# Altium PCB 底板.PcbDoc
Units mm, origin at the board's own origin, x right, y up, seen from the top; angles counter-clockwise.
Board outline 422.53 x 103.76 mm, 4 copper layers (Top Layer, GND, VCC, Bottom Layer); 122 components, 122 nets, 427 pads, 149 vias.
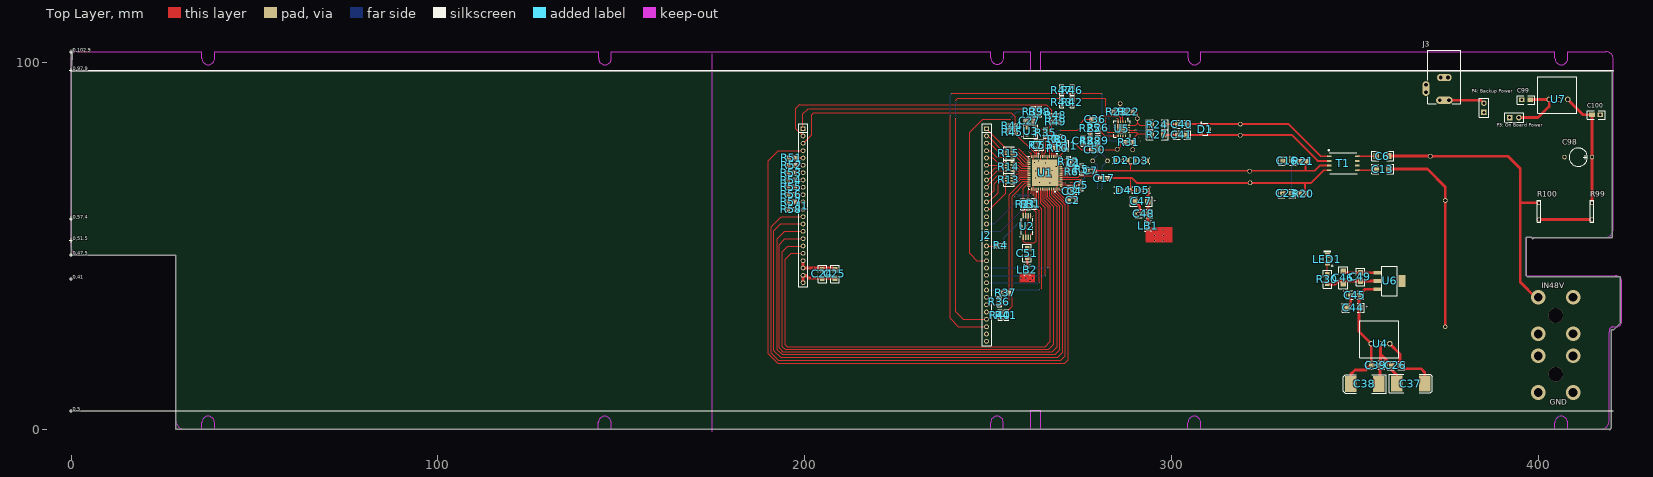
[diagram p0: Top Layer view]
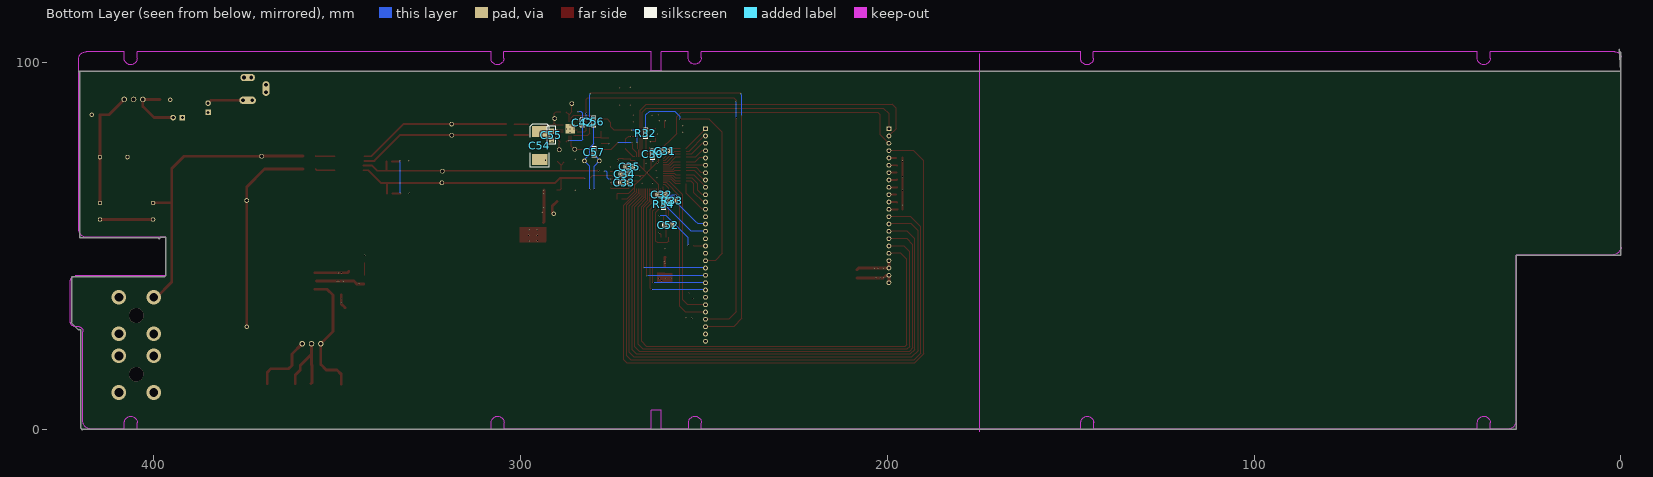
[diagram p1: Bottom Layer view, seen from below]
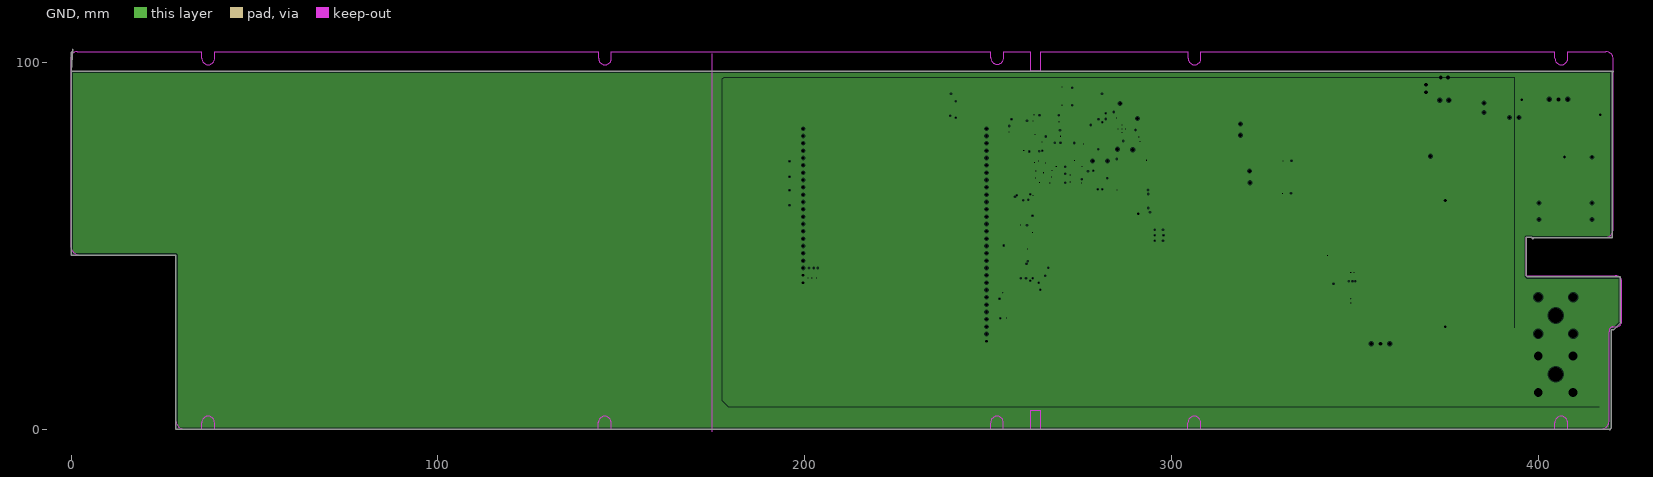
[diagram p2: GND, clearances drawn from the general rule]
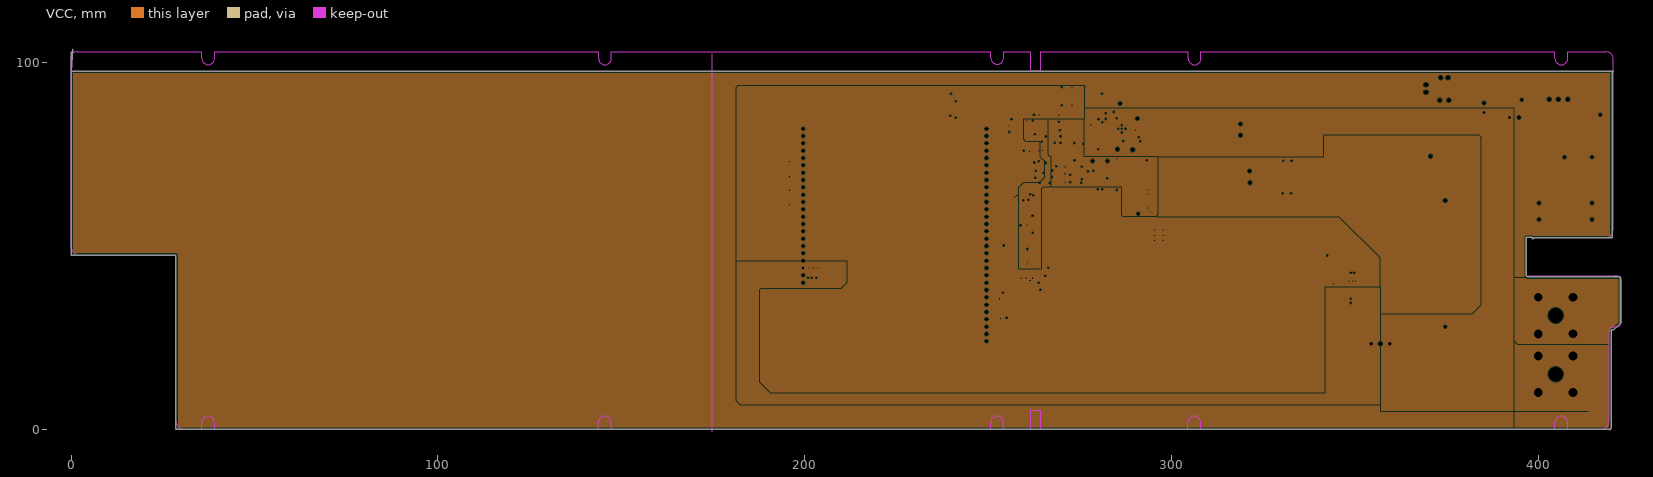
[diagram p3: VCC, clearances drawn from the general rule]

## Layer stack, top to bottom
Top Layer: signal copper 0.0356
Dielectric: core 0.32, FR-4, Dk 4.8
GND: plane copper 0.0356, net GND
Dielectric: prepreg 0.32, FR-4, Dk 4.8
VCC: plane copper 0.0356
Dielectric: core 0.32, FR-4, Dk 4.8
Bottom Layer: signal copper 0.0356

## Board outline
0,97.663 420.313,97.663 420.44,97.536 420.116,97.212 420.116,52.197 398.78,52.197 398.526,51.943 398.169,52.3 396.79,52.3 396.79,41.8 397.061,41.529 422.402,41.529 422.402,29.21 422.529,29.083 420.497,27.051 419.862,27.051 419.862,0.254 419.481,-0.127 419.354,0 28.575,0 28.575,47.371 28.448,47.498 0,47.498 0,102.743 0.381,103.124 0.381,103.632

## Design rules (kind name [scope] priority, off if disabled: settings)
Clearance [All] p1: gap=0.152
HoleSize [All] p1: absolutevalues=TRUE maxlimit=5.08 minlimit=0.025 maxpercent=80.000 minpercent=20.000
MinimumSolderMaskSliver [All] p1 off: minsoldermaskwidth=0.254
PlaneClearance [All] p1: clearance=0.254
PlaneConnect [All] p1: planeconnectstyle=Direct reliefexpansion=0.508 reliefentries=4 reliefconductorwidth=0.254 reliefairgap=0.254
PolygonConnect [All] p1: connectstyle=Direct reliefconductorwidth=0.254 reliefentries=4 polygonreliefangle="90 Angle"
RoutingVias [All] p1: holewidth=0.711 width=1.27 viastyle="Through Hole" minholewidth=0.5 minwidth=1 maxholewidth=3 maxwidth=5
SilkToSilkClearance [All] p1 off: silktosilkclearance=0.254
SilkscreenOverComponentPads SilkToSolderMaskClearance [IsPad] p1 off: minsilkscreentomaskgap=0.254
SolderMaskExpansion [All] p1: expansion=0.102
Width [All] p1: maxlimit=3.81 minlimit=0.254 preferedwidth=0.254
22 further rules are at their usual default settings.

## Components (designator, comment, footprint, x,y, rotation, side; value= is the part's Value field where it differs from the comment)
C1 "100nF" "SR0603 - duplicate" 273.558,72.517 r90 top
C2 "100nF" "SR0603 - duplicate" 273.05,62.484 r180 top
C3 "100nF" "SR0603 - duplicate" 272.149,64.907 r270 top
C4 "10uF" "SR0603 - duplicate" 273.673,64.907 r270 top
C5 "100nF" "SR0603 - duplicate" 275.451,66.481 r90 top
C6 "100nF" 1206 355.842,74.482 r0 top
C7 "10nF" "SR0603 - duplicate" 278.003,70.485 r180 top
C13 "100nF" 1206 355.842,70.926 r0 top
C16 "1nF" 0805 330.454,73.152 r0 top
C17 "10nF" "SR0603 - duplicate" 281.686,68.453 r180 top
C23 "270pF" 0805 330.318,64.302 r0 top
C24 "100nF" 0805 204.839,41.208 r90 top
C25 "100nF" 0805 208.268,41.208 r90 top
C26 "100nF" 0805 362.331,17.399 r180 top
C27 "100nF" "SR0603 - duplicate" 261.366,84.074 r180 top
C30 "100nF" "SR0603 - duplicate" 263.906,74.93 r90 bottom
C31 "100nF" "SR0603 - duplicate" 260.477,75.819 r0 bottom
C32 "100nF" "SR0603 - duplicate" 261.493,63.881 r180 bottom
C33 "100nF" "SR0603 - duplicate" 271.768,67.243 r180 bottom
C34 "100nF" "SR0603 - duplicate" 271.653,69.469 r180 bottom
C35 "100nF" "SR0603 - duplicate" 270.244,71.561 r0 bottom
C36 "100nF" "SR0603 - duplicate" 279.273,84.455 r180 top
C37 "10uF" 7343 369.062,12.446 r0 top
C38 "10uF" 7343 348.869,12.319 r180 top
C39 "100nF" 0805 354.572,17.459 r0 top
C40 "330nF" 0805 303.985,83.159 r180 top
C41 "330nF" 0805 303.985,80.238 r180 top
C42 "100nF" SC0603 283.083,83.566 r90 bottom
C43 "100nF" "SR0603 - duplicate" 275.918,78.587 r90 top
C44 "10uF" 1206a 351.282,33.147 r180 top
C45 "100nF" 0805 351.155,36.576 r180 top
C46 "10uF" 1206A 346.837,39.624 r90 top
C47 "10uF" 1206A 293.497,62.103 r180 top
C48 "100nF" 0805 293.624,58.801 r180 top
C49 "100nF" 0805 351.536,40.386 r90 top
C50 "100nF" "SR0603 - duplicate" 279.146,76.2 r180 top
C51 "100nF" 0805 260.664,46.875 r90 top
C52 "100nF" "SR0603 - duplicate" 259.715,55.626 r0 bottom
C53 "100nF" "SR0603 - duplicate" 264.668,77.47 r270 top
C54 "10uF" 7343 294.767,81.153 r90 bottom
C55 "100nF" 0805 291.592,81.28 r270 bottom
C56 "100nF" "SR0603 - duplicate" 280.035,83.82 r270 bottom
C57 "100nF" "SR0603 - duplicate" 279.908,75.565 r270 bottom
C98 "2200uF" Cap_2200uF 407.162,74.168 r0 top
C99 "0.1uF" 0805 395.478,89.789 r0 top
C100 "0.33uF" 0805 416.941,85.725 r180 top
D1 "CDSOT23_T12C" SOT23 309.245,81.788 r270 top
D2 "MBR0520LT1_D" "Schottky Rectifier" 288.036,73.279 r180 top
D3 "MBR0520LT1_D" "Schottky Rectifier" 293.358,73.212 r180 top
D4 "MBR0520LT1_D" "Schottky Rectifier" 285.23,65.211 r0 top
D5 "MBR0520LT1_D" "Schottky Rectifier" 290.183,65.211 r0 top
J1 "Edge Con 22" PIN2MM22 199.569,81.95 r270 top
J2 "Edge Con30" PIN2MM30 249.569,81.95 r270 top
J3 "IN12" KLD-0202 374.396,103.378 r270 top
LB1 "BLM21PG221SN1D" SL0805 293.624,55.499 r90 top
LB2 "BLM21PG221SN1D" SL0805 260.664,43.446 r90 top
LED1 "LED1" SD0805-LED 342.519,46.355 r90 top
"P3: On Board Power" "" HDR1X2 392.176,84.963 r0 top
"P4: Backup Power" "" HDR1X2 385.191,86.36 r90 top
R1 "33" "SR0603 - duplicate" 262.509,61.468 r270 top
R2 "33" "SR0603 - duplicate" 259.461,61.341 r90 top
R3 "33" "SR0603 - duplicate" 260.985,61.341 r90 top
R4 "33" "SR0603 - duplicate" 253.48,50.098 r180 top
R5 "2.7k" "SR0603 - duplicate" 275.59,70.866 r270 top
R6 "2.7k" "SR0603 - duplicate" 272.784,70.164 r180 top
R7 "49.9" "SR0603 - duplicate" 263.144,77.47 r90 top
R8 "49.9" "SR0603 - duplicate" 268.224,78.994 r90 top
R9 "49.9" "SR0603 - duplicate" 269.748,78.994 r90 top
R10 "100" "SR0603 - duplicate" 268.986,76.581 r0 top
R11 "49.9" "SR0603 - duplicate" 271.399,77.343 r90 top
R12 "49.9" "SR0603 - duplicate" 272.022,72.958 r90 top
R13 "RN" R4R 254.877,66.862 r0 top
R14 "RN" R4R 254.877,70.418 r0 top
R15 "RN" R4R 254.877,74.101 r0 top
R20 "4.7k" "SR0603 - duplicate" 335.915,64.262 r0 top
R21 "4.7k" "SR0603 - duplicate" 335.915,73.025 r0 top
R22 "1k" "SR0603 - duplicate" 288.417,86.487 r180 top
R23 "330" "SR0603 - duplicate" 285.115,86.487 r0 top
R24 "2.7" 1206 297.889,83.032 r180 top
R25 "10k" "SR0603 - duplicate" 277.876,82.042 r90 top
R26 "1k" "SR0603 - duplicate" 279.982,82.143 r90 top
R27 "2.7" 1206 297.889,80.238 r180 top
R28 "10k" "SR0603 - duplicate" 277.95,78.587 r90 top
R29 "1k" "SR0603 - duplicate" 279.982,78.714 r90 top
R30 "1K" 0805 342.519,39.751 r90 top
R31 "1k" "SR0603 - duplicate" 288.417,78.232 r180 top
R32 "33" "SR0603 - duplicate" 265.811,80.645 r90 bottom
R33 "33" "SR0603 - duplicate" 258.572,62.357 r180 bottom
R34 "33" "SR0603 - duplicate" 260.985,61.341 r270 bottom
R35 "33" "SR0603 - duplicate" 265.684,80.772 r270 top
R36 "4.7k" "SR0603 - duplicate" 253.111,34.798 r270 top
R37 "1k" "SR0603 - duplicate" 254.762,37.211 r180 top
R38 "4.7k" "SR0603 - duplicate" 264.033,86.614 r90 top
R39 "1k" "SR0603 - duplicate" 262.382,86.614 r270 top
R40 "4.7k" "SR0603 - duplicate" 253.365,31.115 r90 top
R41 "1k" "SR0603 - duplicate" 255.016,31.115 r270 top
R42 "4.7k" "SR0603 - duplicate" 272.923,89.154 r90 top
R43 "1k" "SR0603 - duplicate" 270.129,89.154 r270 top
R44 "4.7k" "SR0603 - duplicate" 256.591,82.677 r0 top
R45 "1k" "SR0603 - duplicate" 256.591,81.026 r180 top
R46 "4.7k" "SR0603 - duplicate" 272.923,92.456 r270 top
R47 "1k" "SR0603 - duplicate" 270.129,92.456 r90 top
R48 "4.7k" "SR0603 - duplicate" 268.478,85.598 r180 top
R49 "1k" "SR0603 - duplicate" 268.478,83.82 r0 top
R51 "4.7k" "SR0603 - duplicate" 196.469,74.041 r0 top
R52 "4.7k" "SR0603 - duplicate" 196.469,72.009 r0 top
R53 "4.7k" "SR0603 - duplicate" 196.342,69.977 r0 top
R54 "4.7k" "SR0603 - duplicate" 196.342,67.945 r0 top
R55 "4.7k" "SR0603 - duplicate" 196.342,66.04 r0 top
R56 "4.7k" "SR0603 - duplicate" 196.342,64.008 r0 top
R57 "4.7k" "SR0603 - duplicate" 196.342,61.976 r0 top
R58 "4.7k" "SR0603 - duplicate" 196.342,59.944 r0 top
R99 "27R" "Axial 0.4" 414.655,54.483 r90 top
R100 "27R" "Axial 0.4" 400.177,54.483 r90 top
T1 "" TRANS 343.027,74.422 r270 top
U1 "AD9866BCPZ" CP_64_3 265.545,69.91 r0 top
U2 "CDCV304_PW_8" PW8 260.592,55.305 r90 top
U3 "CLK_25M" 25MHZ 260.604,82.169 r0 top
U4 "K7805-1000(L)" K7805-1000L 359.525,23.301 r180 top
U5 "ISL1557IRZ" QFN16 286.586,81.635 r270 top
U6 "SPX1117-3.3" SOT-223S 356.108,42.672 r270 top
U7 "K7812-1000(L)" K7805-1000L 408.051,89.916 r180 top (schematic designator U4)

## Footprints (in the part's own frame and the unit in brackets; to place one, negate y for a bottom-side part, rotate by r counter-clockwise, add the part's x,y. Pads: shape width x height; smd on the part's side, far side on the other; paste and mask are expansions set on the pad)
25MHZ [mm]
  rect 0.9x1 smd: 1(0,-1.9) 2(2.1,-1.9) 3(2.1,0) 4(0,0)
  silkscreen extent -0.89,-2.79 2.92,0.89
0805 [mil]
  rect 60x50 smd: 1(-0.06,0.6) 2(89.94,0.6)
  silkscreen extent -50,-44 140,46
1206 [mil]
  rect 60x60 smd: 1(0.1,-0.1) 2(135.1,-0.1)
  silkscreen extent -50,-50 185,50
1206a [mil]
  rect 60x60 smd: 1(-0.43,0.4) 2(134.57,0.4)
  silkscreen extent -50,-50 185,50
1206A [mil]
  rect 60x60 smd: 1(-0.43,0.4) 2(134.57,0.4)
  silkscreen extent -50,-50 185,50
7343 [mm]
  rect 3.048x4.3 smd: 1(-0.015,-0.018) 2(-7.635,-0.018)
  silkscreen extent -9.67,-2.56 2.02,2.52
"Axial 0.4" [mm]
  round 1.2 hole 0.8: 1(2.7,0) 2(7.2,0)
  silkscreen extent 1.91,-0.5 8,0.5
Cap_2200uF [mm]
  round 1.2 hole 0.8: 1(0,0) 2(7.5,0)
  silkscreen extent 1.25,-2.5 6.25,2.5
CP_64_3 [mil]
  rect 30x12 smd mask+5: 1(-173,147.64) 16(-173,-147.64) 33(173,-147.64) 48(173,147.64)
  rect 32x12 smd mask+5: 2(-173,127.95) 3(-173,108.27) 4(-173,88.58) 5(-173,68.9) 6(-173,49.21) 7(-173,29.53) 8(-173,9.84) 9(-173,-9.84) 10(-173,-29.53) 11(-173,-49.21) 12(-173,-68.9) 13(-173,-88.58) 14(-173,-108.27) 15(-173,-127.95) 34(173,-127.95) 35(173,-108.27) 36(173,-88.58) 37(173,-68.9) 38(173,-49.21) 39(173,-29.53) 40(173,-9.84) 41(173,9.84) 42(173,29.53) 43(173,49.21) 44(173,68.9) 45(173,88.58) 46(173,108.27) 47(173,127.95)
  rect 12x30 smd mask+5: 17(-147.64,-173) 32(147.64,-173) 49(147.64,173) 64(-147.64,173)
  rect 12x32 smd mask+5: 18(-127.95,-173) 19(-108.27,-173) 20(-88.58,-173) 21(-68.9,-173) 22(-49.21,-173) 23(-29.53,-173) 24(-9.84,-173) 25(9.84,-173) 26(29.53,-173) 27(49.21,-173) 28(68.9,-173) 29(88.58,-173) 30(108.27,-173) 31(127.95,-173) 50(127.95,173) 51(108.27,173) 52(88.58,173) 53(68.9,173) 54(49.21,173) 55(29.53,173) 56(9.84,173) 57(-9.84,173) 58(-29.53,173) 59(-49.21,173) 60(-68.9,173) 61(-88.58,173) 62(-108.27,173) 63(-127.95,173)
  rect 285x285 smd: 65(0,0)
  silkscreen extent -190,-209 177,209
HDR1X2 [mm] "Connector; Header; 2 Position"
  rect 1.5x1.5 hole 0.9: 1(0,0)
  round 1.5 hole 0.9: 2(2.54,0)
  silkscreen extent -1.27,-1.27 3.81,1.27
K7805-1000L [mm]
  round 1.5 hole 1: 1(0,0) 2(2.54,0) 3(5.08,0)
  silkscreen extent -2.41,-6.22 8.26,3.81
KLD-0202 [mm] "DC Power Jack, 2.5mm, KLD Series, PCB Mount"
  oval 2x4.5 all layers, no hole: 1(13.7,0)
  round 1.5 hole 1: 1A(13.7,-1.25) 1B(13.7,1.25) 2A(7.5,-1) 2B(7.5,1) 3A(9.5,-5) 3B(11.5,-5)
  oval 2x4 all layers, no hole: 2(7.5,0)
  oval 4x2 all layers, no hole: 3(10.5,-5)
  silkscreen extent 0,-4.5 14.6,4.5
PIN2MM22 [mm]
  rect 1.3x1.3 hole 0.75: 1(0,0)
  round 1.3 hole 0.75: 2(2,0) 3(4,0) 4(6,0) 5(8,0) 6(10,0) 7(12,0) 8(14,0) 9(16,0) 10(18,0) 12(22,0) 13(24,0) 14(26,0) 15(28,0) 16(30,0) 17(32,0) 18(34,0) 19(36,0) 20(38,0) 21(40,0) 22(42,0)
  round 1.3 hole 0.75 paste+0: 11(20,0)
  silkscreen extent -1.27,-1.27 43.05,1.27
PIN2MM30 [mm]
  rect 1.3x1.3 hole 0.75: 1(0,0)
  round 1.3 hole 0.75: 2(2,0) 3(4,0) 4(6,0) 5(8,0) 6(10,0) 7(12,0) 8(14,0) 9(16,0) 10(18,0) 12(22,0) 13(24,0) 14(26,0) 15(28,0) 16(30,0) 17(32,0) 18(34,0) 19(36,0) 20(38,0) 21(40,0) 22(42,0) 23(44,0) 24(46,0) 25(48,0) 26(50,0) 27(52,0) 28(54,0) 29(56,0) 30(58,0)
  round 1.3 hole 0.75 paste+0: 11(20,0)
  silkscreen extent -1.27,-1.27 59.18,1.29
PW8 [mil]
  rect 58x14 smd: 1(-115,38.39) 2(-115,12.8) 3(-115,-12.8) 4(-115,-38.39) 5(115,-38.39) 6(115,-12.8) 7(115,12.8) 8(115,38.39)
  silkscreen extent -115,-61 88,70
QFN16 [mm]
  rect 0.727x0.3 smd paste-0.15 mask+0.051: 1(-2.154,0.848) 2(-2.154,0.198) 3(-2.154,-0.452) 4(-2.154,-1.102) 9(1.646,-1.102) 10(1.646,-0.452) 11(1.646,0.198) 12(1.646,0.848)
  rect 0.3x0.727 smd paste-0.15 mask+0.051: 5(-1.229,-2.027) 6(-0.579,-2.027) 7(0.071,-2.027) 8(0.721,-2.027) 13(0.721,1.773) 14(0.071,1.773) 15(-0.579,1.773) 16(-1.229,1.773)
  rect 2.6x2.6 smd paste-1.3 mask+0.051: 17(-0.254,-0.127)
  rect 2.6x2.6 smd far side paste-1.3 mask+0.051: 17(-0.254,-0.127)
  silkscreen extent -3.18,-2.38 2,2.12
R4R [mm]
  rect 0.65x0.5 smd: 1(0,0) 2(0,0.8) 3(0,1.6) 4(0,2.4) 5(1.6,2.4) 6(1.6,1.6) 7(1.6,0.8) 8(1.6,0)
  silkscreen extent -0.64,-0.64 2.29,2.92
SC0603 [mil]
  rect 30x32 smd: 1(-27,0) 2(27,0)
  silkscreen extent -51,-24 51,24
"Schottky Rectifier" [mm]
  rect 0.91x1.22 smd: 1(0,0) 2(3.391,0)
  silkscreen extent -0.77,-0.85 4.08,0.85
SD0805-LED [mil]
  rect 50x55 smd: 1(-40,0) 2(40,0)
  silkscreen extent -80,-60 95,42
SL0805 [mil]
  rect 37x50 smd: 1(-33.5,0) 2(33.5,0)
  silkscreen extent -60,-34 60,34
SOT23 [mil]
  rect 35x35 smd: 1(-40,-45) 2(40,-45) 3(0,45)
  silkscreen extent -75,-50 65,28
SOT-223S [mm]
  rect 3.2x2 smd: 0(2.249,6.75)
  rect 1x2 smd: 1(-0.001,0) 2(2.285,0) 3(4.499,0)
  silkscreen extent -1.75,1.25 6.25,5.5
"SR0603 - duplicate" [mil]
  rect 36x32 smd: 1(-33,0) 2(33,0)
  silkscreen extent -57,-22 57,22
TRANS [mm]
  rect 0.5x1.2 smd: 1(0,0) 2(1.27,0) 3(2.54,0) 4(3.81,0) 5(3.81,7.62) 6(2.54,7.62) 7(1.27,7.62) 8(0,7.62)
  silkscreen extent -1.78,-0.25 4.83,7.62

## Part data
C24 C25 C31 C32 C33 C34 C35 C52 C53: library part "Cap Semi", "Capacitor (S"
C30: library part "Cap Semi", "Capacitor (Semicon"
D1: library part "D-TVS PSOT1"
D2 D3 D4 D5: library part "Diode 1N4934", "1 Amp"
J1: library part "Edge Con"

## Free pads (board coordinates)
  round 1.27 hole 0.889: 0(278.511,73.152) 0(282.575,73.152) 0(370.586,74.422) 0(374.65,62.357) ""(285.242,76.327) ""(286.004,88.773) ""(289.433,76.2) ""(290.703,84.709) ""(318.77,80.137) ""(318.77,83.185) ""(321.31,70.358) ""(321.437,67.183)

## Via types
v1: diameter 0.406, hole 0.203, Top Layer to Bottom Layer, 129 vias
v2: diameter 4, hole 2.4, Top Layer to Bottom Layer, 8 vias
v3: diameter 0.5, hole 0.2, Top Layer to Bottom Layer, 5 vias
v4: diameter 1.27, hole 0.711, Top Layer to Bottom Layer, 4 vias
v5: diameter 4, hole 4, Top Layer to Bottom Layer, 2 vias
v6: diameter 0.508, hole 0.254, Top Layer to Bottom Layer, 1 vias

## Nets (pads, with @x,y where several pads share a name; then routed paths per layer and width w, separated by ;. In a path a pad name is that pad's centre, name@x,y a point inside that pad or via, vN(x,y) a via of type N, cw(c..) or ccw(c..) an arc to the next point about the centre after c; other vN are vias at no path point)
5V: C24.2 C25.2 C38.1 C39.1 C44.1 C45.1 J1.19 J1.20 U4.3 U6.3 | length 46.1
  Top Layer w0.762: J1.19 J1.20 207.795,43.95 C25.2 ; C38.1 348.884,15.001 350.012,16.129 352.974,16.129 354.445,17.6 U4.3 354.445,23.38 351.157,26.668 C45.1 352.769,38.173 U6.3
  other v1: 201.168,43.942 202.438,43.942 203.581,43.942
12V_48: "P3: On Board Power.2" C99.2 U7.3 | length 16.1
  Top Layer w0.762: 394.716,84.963 399.923,84.963 402.971,88.011 U7.3 C99.2@398.255,89.916
+12V: "P3: On Board Power.1" "P4: Backup Power.1" C26.1 C37.1 C54.1 C55.1 R25.2 U4.1 U5.14 | length 24.3
  Top Layer w0.254: U5.14 v6(290.195,81.564)
  Top Layer w0.381: R25.2@277.95,82.753 R25.2@278.026,82.829
  Top Layer w0.762: U4.1 362.333,20.494 C26.1 363.206,16.51 368.046,16.51 369.047,15.509 C37.1
  Bottom Layer w0.254: v6(290.195,81.564) 294.322,81.564 C54.1
  other v1: 278.003,82.931
AD_CFG: J1.1 R38.2 R39.1 U1.54 | length 84.3
  Top Layer w0.254: J1.1@199.517,81.95 199.517,85.979 200.914,87.376 ; 201.041,87.376 265.811,87.376 266.795,86.392 U1.54
AD_MODE: J1.2 R48.2 R49.1 U1.53 | length 91.8
  Top Layer w0.254: 198.652,88.543 197.6,87.491 197.6,81.919 J1.2 ; 198.676,88.519 265.811,88.519 267.303,87.027 267.303,75.371 267.295,75.363 U1.53
AD_OSCIN: R32.1 R35.2 U1.57 | length 5.7
  Top Layer w0.254: U1.57 265.295,75.121 265.672,75.498 R35.2@265.672,79.842
  other v1: 265.773,79.816
AD_RCLK: R3.2 R34.1 U1.16 | length 3.7
  Top Layer w0.254: v1(260.973,62.519) 260.973,65.084 261.151,65.262 U1.16@261.151,66.127
AD_RST: J1.4 U1.30 | length 194.6
  Top Layer w0.254: J1.4 192.845,75.95 190.107,73.212 190.107,20.507 192.647,17.967 270.879,17.967 271.895,18.983 271.895,61.02 268.295,64.62 U1.30
AD_RXEN: J2.25 R36.2 R37.1 U1.13 | length 42.4
  Top Layer w0.254: J2.25 254.477,33.95 255.766,35.239 255.766,63.941 259.485,67.66 U1.13
AD_TCLK: R2.2 R33.1 U1.15 | length 5.3
  Top Layer w0.254: v1(259.576,62.392) 259.576,65.719 260.517,66.66 U1.15
AD_TXEN: J2.26 R40.2 R41.1 U1.14 | length 43.8
  Top Layer w0.254: J2.26 255.017,31.95 256.528,33.461 256.528,63.56 260.128,67.16 U1.14
ADIO0: J2.12 R13.1 | length 9.7
  Top Layer w0.254: J2.12 250.505,59.95 254.877,64.322 R13.1
ADIO1: J2.11 R13.2 | length 9.1
  Top Layer w0.254: J2.11 250.219,61.95 252.718,64.449 252.718,66.862 253.518,67.662 R13.2
ADIO2: J2.10 R13.3 | length 8.2
  Top Layer w0.254: J2.10 250.441,63.95 251.702,65.211 251.702,66.989 253.175,68.462 R13.3
ADIO3: J2.9 R13.4 | length 6.8
  Top Layer w0.254: J2.9 249.569,66.126 252.705,69.262 R13.4
ADIO4: J2.8 R14.1 | length 6.3
  Top Layer w0.254: J2.8 249.996,67.95 252.464,70.418 R14.1
ADIO5: J2.7 R14.2 | length 5.8
  Top Layer w0.254: J2.7 250.686,69.95 251.954,71.218 R14.2
ADIO6: J2.6 R14.3 | length 5.3
  Top Layer w0.254: J2.6 249.637,72.018 R14.3
ADIO7: J2.5 R14.4 | length 5.8
  Top Layer w0.254: J2.5 251.321,73.95 252.453,72.818 R14.4
ADIO8: J2.4 R15.1 | length 6.1
  Top Layer w0.254: J2.4 250.559,75.95 252.408,74.101 R15.1
ADIO9: J2.3 R15.2 | length 6.6
  Top Layer w0.254: J2.3 250.393,77.95 253.442,74.901 R15.2
ADIO10: J2.2 R15.3 | length 7.1
  Top Layer w0.254: J2.2 249.917,79.95 254.166,75.701 R15.3
ADIO11: J2.1 R15.4 | length 7.6
  Top Layer w0.254: J2.1 254.877,76.642 R15.4
AID0: J1.5 R51.2 | length 1.9
  Top Layer w0.508: R51.2@197.677,73.95 J1.5
AID1: J1.6 R52.2 | length 2.3
  Top Layer w0.508: R52.2@197.333,71.882 197.401,71.95 J1.6
AID2: J1.7 R53.2 | length 2.1
  Top Layer w0.508: R53.2@197.486,69.95 J1.7
AID3: J1.8 R54.2 | length 2.3
  Top Layer w0.508: R54.2@197.333,68.072 197.454,67.95 J1.8
AID4: J1.9 R55.2 | length 2.3
  Top Layer w0.508: R55.2@197.333,65.913 197.37,65.95 J1.9
AID5: J1.10 R56.2 | length 1.9
  Top Layer w0.508: 197.656,63.95 J1.10
AID6: J1.11 R57.2 | length 2.3
  Top Layer w0.508: R57.2@197.333,61.849 197.434,61.95 J1.11
AID7: J1.12 R58.2 | length 2.4
  Top Layer w0.508: R58.2@197.206,59.944 197.212,59.95 J1.12
AVDD_3.3: C33.2 C34.2 C35.2 C47.1 C48.1 D2.2 D5.2 LB1.2 U1.35 U1.40 U1.43 | length 12.3
  Top Layer w0.254: U1.35 270.923,67.16 v1(271.006,67.243) ; U1.40 271.002,69.66 v1(271.006,69.656) ; U1.43 270.605,71.16 v1(271.006,71.561)
  Top Layer w0.762: D5.2 293.626,65.159 v1(293.626,64.135) v1@293.626,60.325 ; v1(293.624,60.325) 293.624,58.787 C48.1 293.626,56.475 LB1.2@293.751,56.35
  other v1: 294.132,59.182 293.612,65.211 285.115,73.66
C98_1: C98.2 C100.2 R99.2 U7.1 | length 32
  Top Layer w0.762: U7.1 412.242,85.725 C100.2@414.657,85.725 ; R99.2@414.655,61.976 C100.2@414.655,85.623
CLKOUT1: R1.1 U1.19 | length 3
  Top Layer w0.254: R1.1@262.37,62.671 262.795,63.096 U1.19
CLKVDD_3.3: C27.2 C51.1 C52.2 C53.2 LB2.2 U1.58 U2.2 U2.6 U3.4 | length 13.5
  Top Layer w0.254: U2.2 260.267,54.273 260.604,54.61 v1(260.604,55.626) 260.917,55.939 U2.6 ; U3.4@260.68,82.245 C27.2@260.68,84.074 ; U1.58 264.808,74.318 C53.2@264.808,76.819
  Top Layer w0.762: C51.1 260.664,46.858 LB2.2
  Bottom Layer w0.254: C52.2@260.401,55.626 C52.2@260.858,55.626
  other v1: 260.477,45.085 260.858,45.847 264.808,75.946 260.604,84.074
DVDD_3.3: C30.2 C31.2 C32.2 C46.1 C49.1 LB1.1 LB2.1 R30.1 R36.1 R38.1 R40.1 R42.1 R44.1 R46.1 R48.1 R51.1 R52.1 R53.1 R54.1 R55.1 R56.1 R57.1 R58.1 U1.17 U1.60 U1.64 U6.2 | length 36.4
  Top Layer w0.254: v1(261.255,75.708) 261.239,75.692 261.795,75.136 U1.64 ; v1(261.493,64.008) 261.795,64.31 U1.17 ; U1.60 v1@263.795,75.751
  Top Layer w0.508: R58.1@195.859,59.944 R51.1@195.859,74.041
  Top Layer w0.762: R30.1@342.762,39.613 344.668,39.613 345.439,40.384 v1@349.362,40.384 ; v1(349.362,40.387) U6.2@355.6,40.387
  Bottom Layer w0.508: v1@257.302,63.373 257.616,63.687 ; v1@257.937,63.754 261.16,63.754 v1@261.382,63.976 ; v1(261.255,75.708) 261.239,75.692 261.603,75.692 C31.2@261.636,75.724
  other v1: 253.365,30.226 253.111,35.56 344.17,39.613 348.361,40.384 350.139,40.386 261.493,40.513 258.953,41.148 260.35,41.148 262.128,41.148 295.402,51.435 297.688,51.435 295.402,52.832 297.815,52.832 295.402,54.356 297.688,54.356 195.859,61.087 257.327,63.373 257.81,63.754 195.859,65.151 195.859,68.834 195.859,73.025 263.906,75.819 255.753,82.677 269.316,85.598 264.033,85.649 272.923,88.316 272.923,93.091
FPGA_CLK: J2.17 R4.2 | length 3.2
  Top Layer w0.254: J2.17 252.595,49.95 R4.2@252.743,50.098
GND: C1.2 C2.2 C5.2 C13.2 C16.1 C23.1 C24.1 C25.1 C26.2 C27.1 C30.1 C31.1 C32.1 C33.1 C34.1 C35.1 C37.2 C38.2 C39.2 C43.1 C44.2 C45.2 C46.2 C47.2 C48.2 C49.2 C51.2 C52.1 C53.1 C54.2 C55.2 C98.1 C99.1 C100.1 D3.1 D4.1 J1.21 J1.22 J2.30 J3.2 J3.2A J3.2B J3.3 J3.3A J3.3B LED1.2 pad.0@374.65,62.357 R5.1 R7.2 R8.2 R9.2 R11.2 R12.2 R28.1 R37.2 R39.2 R41.2 R43.2 R45.2 R47.2 R49.2 U1.18 U1.31 U1.34 U1.36 U1.39 U1.44 U1.47 U1.48 U1.55 U1.59 U1.63 U1.65 U2.4 U3.2 U4.2 U5.4 U5.7 U5.17 U6.1 U7.2 | length 184.8
  Top Layer w0.254: U2.4 261.567,53.033 v1(262.128,53.594) ; v1@262.255,63.627 262.295,63.667 262.295,66.66 U1.65 ; U1.63 262.295,73.16 U1.65@264.295,71.16 ; 263.2,80.075 263.2,78.462 263.132,78.394 264.605,78.394 v1(264.656,78.343) ; v1(263.767,73.085) U1.65@263.767,73.323 ; U1.59 U1.65@264.295,71.16 ; U1.55 U1.65@266.295,70.66 ; R8.2@268.224,79.756 270.637,79.756 ; v1(268.593,71.66) U1.44 ; U1.36 U1.65@267.795,67.66 ; 270.69,79.703 271.26,79.133 R11.2@271.26,78.013 ; C2.2@272.352,62.671 271.006,62.671 268.795,64.882 U1.65@268.795,66.66 ; v1(272.403,67.37) 275.248,67.37 v1(275.451,67.167) 274.944,66.66 U1.65@268.795,66.66 ; v1(272.415,69.342) 272.288,69.342 272.094,69.148 266.307,69.148 U1.65@266.295,69.16 ; v1(273.558,73.279) 273.558,73.021 273.546,73.009 273.546,73.339 273.19,73.695 272.022,73.695 271.987,73.66 U1.48 U1.47 268.795,73.16 U1.65@266.295,70.66 ; C43.1@275.969,77.851 R28.1@277.95,77.851 ; U5.7 U5.17@286.134,81.564 ; v1(285.062,84.81) 285.484,84.388 285.484,82.864 v3(286.459,81.889) ; U1.65@264.295,71.16 U1.65 ; U1.65 U1.65@266.295,69.16 ; U1.65 U1.65@266.295,70.66 ; U1.65@266.295,69.16 U1.65@267.795,67.66 ; U1.65@267.795,67.66 U1.65@268.795,66.66
  Top Layer w0.762: J1.22 J1.21 200.287,41.95 201.03,41.207 C24.1 C25.1 ; C47.2 291.34,60.832 C48.2 ; C46.2 347.196,42.673 U6.1 ; C44.2 348.871,34.144 C45.2 ; C39.2 356.856,12.689 C38.2@357.117,12.428 ; C39.2@356.985,17.475 356.985,20.446 ; U4.2 356.985,20.446 ; C13.2 369.766,70.924 374.65,66.04 374.65,62.357 v4(374.65,27.94) ; C37.2 361.427,14.747 360.047,16.127 C26.2 356.985,20.446
  Bottom Layer w0.254: C32.1@262.255,63.627 262.255,63.723 v1(262.295,63.762) ; C30.1@263.64,74.432 263.767,74.305 v1(263.767,73.085) ; v1(268.593,71.66) 269.459,71.66 C35.1@269.558,71.561 ; v1@275.969,77.718 v1@275.969,77.851
  other v1: 255.016,30.353 348.869,34.417 348.871,35.56 254,37.211 200.914,41.275 201.93,41.275 203.2,41.275 348.869,42.673 349.758,42.673 342.519,47.371 260.731,49.149 258.826,55.626 330.316,64.317 285.103,65.211 266.815,67.116 264.021,67.243 262.878,68.513 267.323,68.767 265.164,69.91 263.005,70.418 267.45,70.545 275.59,71.603 265.672,72.577 262.624,72.704 330.452,73.167 293.231,73.339 259.715,75.946 275.969,77.784 291.465,78.486 291.084,79.629 269.748,79.883 262.763,80.391 255.753,81.026 269.316,83.82 262.204,84.074 262.509,85.725 270.129,88.316 270.129,93.294
  other v2: 400,10 409.5,10 400,20 409.5,20
  other v3: 286.459,80.889 285.459,81.889 287.459,81.889 286.459,82.889
  other v4: 290.949,58.741 416.943,85.71 395.478,89.789
IN12V: "P4: Backup Power.2" J3.1 J3.1A J3.1B | length 9.9
  Top Layer w0.762: J3.1B@375.65,89.662 384.429,89.662 385.191,88.9
IN48V: C6.2 pad.0@370.586,74.422 R100.2 | length 79.3
  Top Layer w0.762: C6.2 pad.0@370.782,74.48 ; pad.0@370.586,74.422 391.795,74.422 395.097,71.12 395.097,40.259 ; 395.097,40.132 v2@399.415,35.814 ; 395.097,61.722 R100.2@400.05,61.722
  other v2: 400,26 409.5,26.035 400,36 409.5,36
IOUT+: C40.1 D1.1 pad.@318.77,83.185 T1.1 | length 42.2
  Top Layer w0.508: C40.1@303.986,83.185 331.978,83.185 340.741,74.422 T1.1@342.519,74.422
IOUT-: C41.1 D1.2 pad.@318.77,80.137 T1.2 | length 41.5
  Top Layer w0.508: C41.1 332.781,80.223 339.852,73.152 T1.2@342.519,73.152
IOUTP1+: C56.2 pad.0@282.575,73.152 | length 19.4
  Bottom Layer w0.254: C56.2@280.035,83.134 280.035,77.851 281.178,76.708 281.178,74.93 282.575,73.533 282.575,73.152 281.178,71.755 v1(281.178,65.405)
IOUTP1-: C57.2 pad.0@278.511,73.152 | length 10.6
  Bottom Layer w0.254: v1(279.908,65.405) 279.908,71.755 278.511,73.152 278.511,73.482 C57.2@279.908,74.879
IOUTP+: C36.2 R8.1 R10.1 U1.52 | length 18.9
  Top Layer w0.254: U1.52 R10.1@267.795,76.228 ; R10.1@267.983,76.454 267.983,77.835 v1(268.212,78.064) ; v1(269.621,81.534) 274.447,81.534 275.336,82.423 275.336,83.566 276.225,84.455 C36.2@278.587,84.455
  Bottom Layer w0.254: v1(268.212,78.064) 268.212,80.76 268.986,81.534 v1(269.621,81.534)
IOUTP-: C50.2 R9.1 R10.2 U1.51 | length 13.5
  Top Layer w0.254: U1.51 268.295,75.353 269.456,76.514 R9.1@269.456,77.784 ; v1(273.546,78.038) 275.384,76.2 C50.2@278.46,76.2
  Bottom Layer w0.254: v1(269.736,78.064) 273.52,78.064 v1(273.546,78.038)
ISL_C0: J2.27 R42.2 R43.1 U5.8 | length 119.5
  Top Layer w0.254: v1(241.173,84.963) 241.173,32.004 243.227,29.95 J2.27 ; v1(241.173,89.408) 241.173,89.662 241.681,90.17 281.813,90.17 282.067,89.916 v1(282.067,86.106) ; v1(282.067,84.582) 282.067,81.534 282.687,80.914 U5.8
  Bottom Layer w0.254: v1(241.173,84.963) v1(241.173,89.408) ; J2.27 J2.27@249.741,29.778 ; v1(282.067,84.582) v1(282.067,86.106)
ISL_C1: J2.28 R46.2 R47.1 U5.9 | length 128.7
  Top Layer w0.254: v1(239.649,85.471) 239.649,30.226 241.925,27.95 J2.28 ; v1@239.903,91.567 v1@280.924,91.567 ; v1(281.178,83.693) 281.178,80.645 281.834,79.989 U5.9
  Bottom Layer w0.254: v1(239.649,85.471) 239.649,91.186 v1(239.903,91.44) ; J2.28 J2.28@249.619,28 ; v1(281.051,91.44) 281.178,91.313 v1(281.178,83.693)
NetC1_1: C1.1 U1.42 | length 4
  Top Layer w0.254: U1.42 270.867,70.66 271.387,71.18 273.089,71.18 C1.1@273.546,71.638
NetC6_1: C6.1 T1.8 | length 5.2
  Top Layer w0.508: T1.8 355.786,74.422 C6.1
NetC7_1: C7.1 D2.1 D3.2 pad.@321.31,70.358 R21.2 T1.3 | length 71
  Top Layer w0.254: v1(278.689,70.485) C7.1@278.878,70.674 ; D2.1@288.151,72.831 288.951,72.031 ; 288.951,70.672 288.951,72.031 ; D3.2@290.056,72.869 289.789,72.869 288.951,72.031
  Top Layer w0.508: C7.1 339.09,70.485 340.487,71.882 T1.3@342.773,71.882 ; 336.525,70.697 R21.2@336.525,73.025
NetC8_1: 
NetC8_2: 
NetC9_1: 
NetC10_1: 
NetC11_1: 
NetC12_1: 
NetC12_2: 
NetC13_1: C13.1 T1.5 | length 5.3
  Top Layer w0.508: T1.5 355.532,70.612 C13.1
NetC14_2: C17.1 D4.2 D5.1 pad.@321.437,67.183 R20.2 T1.4 | length 69
  Top Layer w0.254: 288.951,68.326 288.951,65.542 289.281,65.211 D5.1
  Top Layer w0.508: C17.1 289.306,68.453 290.591,67.168 338.059,67.168 341.503,70.612 T1.4@342.773,70.612 ; R20.2@336.398,64.262 336.398,66.941
  other v1: 282.499,68.453
NetC15_2: 
NetC16_2: C16.2 C23.2 R20.1 R21.1 | length 13.4
  Top Layer w0.254: C23.2@332.672,64.67 C23.2@332.687,64.655
  Top Layer w0.508: C23.2@332.657,64.262 R20.1@334.924,64.262 ; C16.2@332.881,73.025 R21.1@335.051,73.025
  Bottom Layer w0.254: v1(332.602,64.317) 332.738,64.453 v1(332.738,73.167)
NetC18_1: 
NetC19_1: 
NetC20_1: 
NetC21_1: 
NetC22_1: 
NetC22_2: 
NetC36_1: C36.1 C56.1 R26.2 U5.3 | length 9.2
  Top Layer w0.254: R26.2@279.982,82.88 R26.2@279.983,82.882 ; R26.2@280.11,83.271 280.11,84.939 280.617,85.445 285.57,85.445 286.134,84.881 U5.3
  other v1: 280.11,84.541
NetC40_2: C40.2 R24.1 | length 3.7
  Top Layer w0.508: R24.1@297.995,83.144 C40.2
NetC41_2: C41.2 R27.1 | length 3.8
  Top Layer w0.508: R27.1 297.904,80.223 C41.2
NetC42_1: C42.1 R31.2 U5.11 | length 10.3
  Top Layer w0.254: v1@286.784,78.542 v1@286.789,78.537 ; v1@286.784,78.587 U5.11 ; v1(286.84,78.587) 287.325,78.587 R31.2@287.68,78.232
  Bottom Layer w0.254: C42.1 283.083,78.915 283.411,78.587 v1(286.84,78.587)
NetC42_2: C42.2 R23.1 | length 3.4
  Bottom Layer w0.254: C42.2 283.083,86.106 283.464,86.487 284.505,86.487
  other v1: 284.277,86.487
NetC43_2: C43.2 R25.1 R26.1 R28.2 R29.2 | length 8
  Top Layer w0.254: C43.2@275.918,79.273 275.969,79.324 R28.2@277.95,79.324 ; R25.1@277.95,81.28 R28.2@277.95,79.324 ; R26.1@279.982,81.407 279.982,79.451 278.077,79.451 R28.2@277.95,79.324
NetC50_1: C50.1 C57.1 pad.@285.242,76.327 R29.1 U5.10 | length 11.4
  Top Layer w0.254: R29.1@279.982,77.978 279.982,76.35 279.832,76.2 285.242,76.2 286.134,77.092 U5.10
  other v1: 280.035,76.327
NetJ2_14: J2.14 R33.2 | length 11.2
  Bottom Layer w0.254: J2.14 251.585,55.95 252.21,56.575 252.235,56.575 R33.2@258.077,62.417
NetJ2_15: J2.15 R34.2 | length 14.4
  Bottom Layer w0.254: J2.15@249.416,54.035 253.48,54.035 260.363,60.919 R34.2@260.973,60.919
NetJ2_19: J2.19 R32.2 | length 66.8
  Top Layer w0.254: J2.19 246.96,45.95 244.971,47.939 244.971,80.959 248.527,84.515 v1(256.401,84.515)
  Bottom Layer w0.254: v1(256.401,84.515) 256.401,85.205 257.81,86.614 264.922,86.614 265.811,85.725 265.811,83.845 ; R32.2@265.799,81.315 265.799,83.832
NetLED1_1: LED1.1 R30.2 | length 3.3
  Top Layer w0.254: R30.2 342.504,45.324 LED1.1
NetR1_2: R1.2 U2.1 | length 15.2
  Top Layer w0.254: U2.1 259.617,51.279 260.096,50.8 262.636,50.8 263.144,51.308 263.144,59.182 262.382,59.944 R1.2@262.382,60.985 ; 262.37,60.071 R1.2@262.37,60.284
NetR2_1: R2.1 U2.8 | length 2.7
  Top Layer w0.254: R2.1@259.576,60.919 259.576,58.267 U2.8
NetR3_1: R3.1 U2.7 | length 3.1
  Top Layer w0.254: U2.7 260.267,59.679 260.973,60.385 260.973,61.046
NetR4_1: R4.1 U2.5 | length 13.1
  Top Layer w0.254: U2.5 v1(262.116,58.226)
  Bottom Layer w0.254: v1(254.242,50.098) 254.242,52.257 260.211,58.226 v1(262.116,58.226)
NetR5_2: R5.2 R6.1 | length 2
  Top Layer w0.254: R6.1@273.52,70.164 R5.2@275.476,70.164
NetR6_2: R6.2 U1.41 | length 2.1
  Top Layer w0.254: U1.41 269.943,70.164 271.216,70.164 271.22,70.16 272.043,70.16 R6.2@272.047,70.164
NetR7_1: R7.1 U1.61 | length 2.7
  Top Layer w0.254: R7.1@263.132,76.921 263.132,75.577 263.295,75.414 U1.61
NetR11_1: R11.1 U1.49 U1.50 | length 3.5
  Top Layer w0.254: U1.50 U1.49 271.26,76.27 R11.1@271.26,76.54
NetR12_1: R12.1 U1.45 U1.46 | length 2.8
  Top Layer w0.254: U1.45 U1.46@269.939,72.627 ; U1.46 U1.46@269.939,72.627 ; R12.1@271.96,72.16 272.022,72.222 271.869,72.222 271.464,72.627 U1.46@269.939,72.627
NetR13_5: R13.5 U1.9 | length 4.8
  Top Layer w0.254: R13.5 257.531,69.262 257.925,69.656 258.095,69.656 ; 258.095,69.66 U1.9
NetR13_6: R13.6 U1.10 | length 5
  Top Layer w0.254: R13.6 257.62,68.462 258.318,69.16 U1.10
NetR13_7: R13.7 U1.11 | length 5.5
  Top Layer w0.254: R13.7 257.709,67.662 258.707,68.66 U1.11 ; 259.969,68.652 260.393,68.652
NetR13_8: R13.8 U1.12 | length 5.2
  Top Layer w0.254: R13.8 257.671,66.862 258.969,68.16 U1.12
NetR14_5: R14.5 U1.5 | length 5.2
  Top Layer w0.254: R14.5 258.319,72.818 259.477,71.66 U1.5
NetR14_6: R14.6 U1.6 | length 5
  Top Layer w0.254: R14.6 258.23,72.018 259.088,71.16 U1.6
NetR14_7: R14.7 U1.7 | length 4.9
  Top Layer w0.254: R14.7 258.141,71.218 258.699,70.66 U1.7
NetR14_8: R14.8 U1.8 | length 4.8
  Top Layer w0.254: R14.8 258.052,70.418 258.31,70.16 U1.8
NetR15_5: R15.5 U1.1 | length 5.8
  Top Layer w0.254: R15.5 258.343,76.501 U1.1@261.151,73.694
NetR15_6: R15.6 U1.2 | length 5.7
  Top Layer w0.254: R15.6 258.103,75.701 260.644,73.16 U1.2
NetR15_7: R15.7 U1.3 | length 5.6
  Top Layer w0.254: R15.7 258.014,74.901 260.255,72.66 U1.3
NetR15_8: R15.8 U1.4 | length 5.5
  Top Layer w0.254: R15.8 257.798,74.101 259.739,72.16 U1.4
NetR22_1: pad.@290.703,84.709 R22.1 R24.2 U5.16 | length 11.3
  Top Layer w0.254: U5.16 290.228,82.864 290.777,83.413 ; R22.1@288.973,86.461 290.396,86.461 290.777,86.08 290.777,83.413 ; R24.2 294.287,82.864 291.326,82.864 290.777,83.413
NetR22_2: pad.@286.004,88.773 R22.2 R23.2 U5.2 | length 6.2
  Top Layer w0.254: R23.2@286.004,86.512 pad.@286.004,88.646 ; R23.2@286.042,86.487 286.784,85.745 ; U5.2 286.784,85.745 ; R22.2@287.5,86.461 286.784,85.745
NetR27_2: pad.@289.433,76.2 R27.2 R31.1 U5.13 | length 11.2
  Top Layer w0.254: U5.13 290.396,80.914 290.818,80.492 ; R31.1@288.973,78.054 R31.1@288.999,78.079 ; R31.1@289.154,78.232 289.56,78.638 289.56,79.235 290.818,80.492 ; pad.@289.38,76.238 R31.1@289.38,78.107 ; R27.2 294.206,80.492 290.818,80.492
NetR35_1: R35.1 U3.3 | length 3.3
  Top Layer w0.254: 263.452,81.723 263.2,81.975 265.291,81.975 265.543,81.723 265.672,81.594 R35.1@265.672,81.315
PGA0: J1.13 U1.29 | length 172.5
  Top Layer w0.254: J1.13 193.641,57.95 190.869,55.178 190.869,20.761 192.774,18.856 269.863,18.856 271.006,19.999 271.006,61.147 267.795,64.358 U1.29
PGA1: J1.14 U1.28 | length 167.3
  Top Layer w0.254: J1.14 193.419,55.95 191.631,54.162 191.631,21.396 193.409,19.618 268.974,19.618 270.371,21.015 270.371,60.893 267.295,63.969 U1.28
PGA2: J1.15 U1.27 | length 161.3
  Top Layer w0.254: J1.15 194.594,53.95 192.52,51.876 192.52,21.694 193.833,20.38 268.339,20.38 269.609,21.65 269.609,60.766 266.795,63.58 U1.27
PGA3: J1.16 U1.26 | length 156.2
  Top Layer w0.254: J1.16 194.626,51.95 193.028,50.352 193.028,22.158 194.044,21.142 267.45,21.142 268.847,22.539 268.847,60.639 266.295,63.191 U1.26
PGA4: J1.17 U1.25 | length 150.4
  Top Layer w0.254: J1.17 195.42,49.95 193.917,48.447 193.917,22.539 194.679,21.777 266.561,21.777 267.958,23.174 267.958,60.639 265.795,62.802 U1.25
PGA5: J1.18 U1.24 | length 144.3
  Top Layer w0.254: J1.18 196.341,47.95 194.679,46.288 194.679,23.047 195.238,22.489 265.545,22.489 267.018,23.962 267.018,60.69 265.295,62.413 U1.24
PWR_DWN: J1.3 R44.2 R45.1 U1.62 | length 78.1
  Top Layer w0.254: J1.3 201.918,80.299 201.918,85.785 202.426,86.293 256.367,86.293 257.429,85.232 257.429,80.566 262.795,75.2 U1.62
R100_1: R99.1 R100.1 | length 14.6
  Top Layer w0.762: R100.1@400.177,57.15 R99.1@414.782,57.15
REFB: C2.1 C3.2 C4.2 U1.32 | length 6.5
  Top Layer w0.254: U1.32 270.235,64.576 270.244,64.576 270.599,64.221 273.673,64.221 273.673,62.722 C2.1@273.724,62.671
REFT: C3.1 C4.1 C5.1 U1.33 | length 5.8
  Top Layer w0.254: U1.33 270.057,66.16 270.625,65.592 275.248,65.592 C5.1@275.451,65.796
RX1+: 
RX1-: 
RX+: C17.2 U1.38 | length 11.6
  Top Layer w0.254: U1.38 274.527,68.66 274.955,69.088 280.492,69.088 C17.2@281.127,68.453
RX-: C7.2 U1.37 | length 9.1
  Top Layer w0.254: U1.37 v1(275.59,68.16)
  Bottom Layer w0.254: v1(275.59,68.16) 275.932,68.16 276.352,68.58 276.352,70.104 276.606,70.358 v1(277.241,70.358)
SPI_CLK: J2.21 U1.22 | length 40.2
  Top Layer w0.254: U1.22 264.295,61.635 265.545,60.385 v1(265.545,41.843)
  Bottom Layer w0.254: J2.21 249.676,41.843 v1(265.545,41.843)
SPI_EN: J2.20 U1.23 | length 39.1
  Top Layer w0.254: U1.23 264.795,62.151 266.434,60.512 v1(266.434,44.002)
  Bottom Layer w0.254: J2.20 249.621,44.002 v1(266.434,44.002)
SPI_SDIO: J2.22 U1.20 | length 40.1
  Top Layer w0.254: U1.20 263.295,60.095 263.894,59.496 263.894,40.065 v1(263.767,39.938)
  Bottom Layer w0.254: J2.22 249.581,39.938 v1(263.767,39.938)
SPI_SDO: J2.23 U1.21 | length 42.7
  Top Layer w0.254: U1.21 263.795,60.865 264.656,60.004 264.656,38.414 v1(264.275,38.033)
  Bottom Layer w0.254: J2.23 249.652,38.033 v1(264.275,38.033)
pads on no net: D1.3 J2.13 J2.16 J2.18 J2.24 J2.29 T1.6 T1.7 U1.56 U2.3 U3.1 U5.1 U5.5 U5.6 U5.12 U5.15 U6.0
copper on no net:
  other v5: 404.75,15 404.75,31

## Polygon pours and split planes (outlines as drawn)
GND on GND (split plane): 419.606,52.707 398.78,52.707 398.68,52.698 398.585,52.669 398.544,52.647 398.53,52.661 398.453,52.724 398.364,52.772 398.269,52.801 398.169,52.81 396.79,52.81 396.69,52.801 396.595,52.772 396.506,52.724 396.429,52.661 396.366,52.584 396.318,52.495 396.289,52.4 396.28,52.3 396.28,41.8 396.289,41.7 396.318,41.605 396.366,41.516 396.429,41.439 396.7,41.168 396.777,41.105 396.866,41.057 396.961,41.028 397.061,41.019 421.892,41.019 421.892,29.21 421.895,29.171 420.286,27.561 419.862,27.561 419.762,27.552 419.667,27.523 419.578,27.475 419.501,27.412 419.438,27.335 419.39,27.246 419.361,27.151 419.352,27.051 419.352,0.51 29.085,0.51 29.085,47.371 29.076,47.471 29.047,47.566 28.999,47.655 28.936,47.732 28.809,47.859 28.732,47.922 28.643,47.97 28.548,47.999 28.448,48.008 0.51,48.008 0.51,97.153 419.606,97.153
no net on VCC (split plane): 384.325,79.586 384.325,33.952 381.973,31.6 357.101,31.6 357.101,38.758 357.124,38.758 357.164,38.766 357.197,38.789 357.22,38.822 357.228,38.862 357.22,38.902 357.197,38.935 357.164,38.958 357.124,38.966 356.974,38.966 356.974,46.736 356.966,46.776 356.943,46.809 345.714,58.039 345.68,58.061 345.64,58.069 296.087,58.069 296.491,58.474 296.502,58.491 296.514,58.507 296.522,58.547 296.522,74.168 296.514,74.208 296.491,74.241 296.487,74.245 341.453,74.245 341.461,74.206 341.483,74.172 341.517,74.149 341.557,74.142 341.596,74.149 341.63,74.172 341.652,74.206 341.66,74.245 341.66,80.16 383.751,80.16
IN48V on VCC (split plane): 393.624,41.347 393.666,41.319 393.715,41.31 396.429,41.31 396.479,41.319 396.521,41.347 396.7,41.168 396.777,41.105 396.866,41.057 396.961,41.028 397.061,41.019 421.892,41.019 421.892,29.21 421.895,29.171 420.286,27.561 419.862,27.561 419.762,27.552 419.667,27.523 419.578,27.475 419.501,27.412 419.438,27.335 419.39,27.246 419.361,27.151 419.352,27.051 419.352,23.243 394.389,23.243 393.55,24.083 393.55,27.94 393.55,41.422
AVDD_3.3 on VCC (split plane): 276.121,74.422 276.129,74.382 276.152,74.349 276.185,74.326 276.225,74.318 295.993,74.318 295.995,74.309 296.017,74.275 296.051,74.253 296.091,74.245 296.194,74.245 296.314,74.125 296.314,58.59 295.867,58.143 286.809,58.143 286.616,58.336 286.616,63.881 286.616,66.04 286.608,66.08 286.596,66.096 286.585,66.113 286.458,66.24 286.425,66.263 286.385,66.271 267.312,66.271 267.312,74.422 267.304,74.462 267.281,74.495 267.248,74.518 267.208,74.526 266.889,74.526 266.55,74.865 266.55,75.438 266.55,84.478 276.121,84.478
GND on VCC (split plane): 394.243,23.022 394.285,22.994 394.335,22.985 419.352,22.985 419.352,0.51 393.55,0.51 393.55,4.849 413.639,4.849 413.679,4.857 413.712,4.88 413.735,4.913 413.743,4.953 413.735,4.993 413.712,5.026 413.679,5.049 413.639,5.057 393.55,5.057 393.55,23.716
+12V on VCC (split plane): 393.342,27.94 393.342,24.077 393.326,24.053 393.317,24.003 393.326,23.953 393.342,23.929 393.342,5.057 357.101,5.057 357.101,6.223 357.101,10.033 357.101,31.392 382.016,31.392 382.056,31.4 382.089,31.423 384.502,33.836 384.525,33.869 384.533,33.909 384.533,79.629 384.525,79.669 384.502,79.702 383.867,80.337 383.834,80.36 383.794,80.368 341.66,80.368 341.621,80.36 341.587,80.337 341.583,80.331 341.576,80.337 341.543,80.36 341.503,80.368 341.463,80.36 341.43,80.337 341.407,80.304 341.399,80.264 341.407,80.224 341.43,80.191 341.453,80.167 341.453,74.452 296.28,74.452 296.237,74.495 296.204,74.518 296.164,74.526 296.124,74.518 296.091,74.495 296.057,74.518 296.018,74.526 276.329,74.526 276.329,84.558 276.338,84.56 276.372,84.582 276.394,84.616 276.402,84.655 276.402,87.387 276.541,87.526 393.342,87.526
DVDD_3.3 on VCC (split plane): 276.279,93.399 276.256,93.365 276.248,93.325 276.248,87.526 276.225,87.503 276.203,87.469 276.195,87.43 276.195,84.686 259.715,84.686 259.675,84.678 259.642,84.655 259.619,84.622 259.611,84.582 259.611,78.994 259.619,78.954 259.642,78.921 259.959,78.603 260.15,78.413 260.183,78.39 260.223,78.382 263.863,78.382 264.056,78.189 264.056,74.295 264.064,74.255 264.087,74.222 264.341,73.968 265.326,72.982 265.326,68.75 263.99,67.414 259.715,67.414 259.675,67.406 259.642,67.383 258.245,65.986 258.222,65.953 258.214,65.913 258.214,45.339 258.214,43.688 258.222,43.648 258.245,43.615 258.278,43.592 258.318,43.584 264.668,43.584 264.708,43.592 264.741,43.615 264.764,43.648 264.772,43.688 264.772,65.616 265.219,66.063 286.342,66.063 286.408,65.997 286.408,63.881 286.408,58.293 286.416,58.253 286.439,58.22 286.693,57.966 286.726,57.943 286.766,57.935 295.886,57.935 295.888,57.926 295.91,57.892 295.944,57.87 295.983,57.862 345.597,57.862 356.766,46.693 356.766,38.966 341.884,38.966 341.844,38.958 341.811,38.935 341.788,38.902 341.78,38.862 341.78,10.01 190.67,10.01 187.81,12.87 187.81,37.93 188.257,38.377 209.931,38.377 209.971,38.385 210.004,38.408 211.655,40.059 211.678,40.092 211.686,40.132 211.686,45.974 211.678,46.014 211.655,46.047 211.622,46.07 211.582,46.078 181.737,46.078 181.697,46.07 181.664,46.047 181.46,45.843 181.46,93.175 181.907,93.622 276.055,93.622
CLKVDD_3.3 on VCC (split plane): 266.342,75.438 266.342,74.823 266.342,74.822 266.342,74.803 266.35,74.763 266.373,74.73 266.406,74.707 266.417,74.705 266.773,74.349 266.807,74.326 266.847,74.318 267.104,74.318 267.104,66.271 265.176,66.271 265.136,66.263 265.12,66.251 265.103,66.24 264.595,65.732 264.572,65.699 264.564,65.659 264.564,43.792 258.422,43.792 258.422,45.339 258.422,65.87 259.758,67.206 264.033,67.206 264.073,67.214 264.106,67.237 265.503,68.634 265.526,68.667 265.534,68.707 265.534,73.025 265.526,73.065 265.503,73.098 264.487,74.114 264.264,74.338 264.264,78.232 264.256,78.272 264.233,78.305 263.979,78.559 263.946,78.582 263.906,78.59 260.266,78.59 260.106,78.75 259.819,79.037 259.819,84.478 266.342,84.478
no net on VCC (split plane): 419.606,52.707 398.78,52.707 398.68,52.698 398.585,52.669 398.544,52.647 398.53,52.661 398.453,52.724 398.364,52.772 398.269,52.801 398.169,52.81 396.79,52.81 396.69,52.801 396.595,52.772 396.506,52.724 396.429,52.661 396.366,52.584 396.318,52.495 396.289,52.4 396.28,52.3 396.28,41.8 396.289,41.7 396.318,41.605 396.338,41.569 393.769,41.569 393.641,41.696 393.599,41.724 393.55,41.734 393.55,87.63 393.542,87.67 393.519,87.703 393.486,87.726 393.446,87.734 276.499,87.734 276.459,87.726 276.456,87.724 276.456,93.301 276.465,93.303 276.499,93.325 276.521,93.359 276.529,93.399 276.521,93.438 276.499,93.472 276.171,93.799 276.138,93.822 276.098,93.83 181.864,93.83 181.824,93.822 181.808,93.81 181.791,93.799 181.283,93.291 181.26,93.258 181.252,93.218 181.252,45.593 181.252,45.466 181.252,16.002 181.252,7.747 181.26,7.707 181.283,7.674 182.426,6.531 182.459,6.508 182.499,6.5 356.893,6.5 356.893,6.223 356.893,4.953 356.901,4.913 356.924,4.88 356.957,4.857 356.997,4.849 393.342,4.849 393.342,0.51 29.085,0.51 29.085,47.371 29.076,47.471 29.047,47.566 28.999,47.655 28.936,47.732 28.809,47.859 28.732,47.922 28.643,47.97 28.548,47.999 28.448,48.008 0.51,48.008 0.51,97.153 419.606,97.153
5V on VCC (split plane): 211.478,40.175 209.888,38.585 188.214,38.585 188.174,38.577 188.158,38.565 188.141,38.554 187.633,38.046 187.61,38.013 187.602,37.973 187.602,12.827 187.61,12.787 187.633,12.754 190.554,9.833 190.571,9.822 190.587,9.81 190.627,9.802 341.884,9.802 341.924,9.81 341.957,9.833 341.98,9.866 341.988,9.906 341.988,38.758 356.893,38.758 356.893,10.033 356.893,9.906 356.893,6.708 182.542,6.708 181.46,7.79 181.46,45.55 181.78,45.87 211.478,45.87

## Keep-outs
Keep-Out Layer:
  lines w0.254: 30.734,0 35.598,0 35.598,1.778 cw(c37.348,1.778) 39.098,1.778 39.098,0 143.748,0 143.748,1.905 ; 31.115,0 cw(c30.924,2.349) 28.575,2.159 28.575,47.498 2.413,47.498 cw(c2.286,49.784) 0,49.657 0,101.346 cw(c1.602,101.297) 1.651,102.9 35.6,102.9 ; 35.65,102.9 35.65,101.1 ccw(c37.4,101.1) 39.15,101.1 39.15,102.9 143.8,102.9 143.8,101.1 ccw(c145.55,101.1) 147.3,101.1 147.3,102.9 250.75,102.9 250.75,101.227 ccw(c252.5,101.227) 254.25,101.227 ; 143.748,1.778 cw(c145.498,1.778) 147.248,1.778 ; 147.248,-0.022 147.248,1.905 ; 147.248,0 250.698,0 250.698,1.673 ; 174.752,-0.635 174.752,102.362 ; 250.698,1.778 cw(c252.448,1.778) 254.198,1.778 254.198,0 261.648,0 ; 254.254,101.227 254.254,102.9 261.7,102.9 261.7,97.79 264.4,97.79 264.4,102.87 ; 261.7,0.097 261.7,5.207 264.4,5.207 264.4,0.127 ; 264.348,-0.022 304.494,-0.022 ; 264.4,102.9 304.546,102.9 ; 304.464,-0.022 304.494,0.008 304.494,1.778 ; 304.498,1.778 cw(c306.248,1.778) 307.998,1.778 307.998,0.03 308.05,-0.022 ; 304.516,102.9 304.546,102.87 304.546,101.1 ; 304.55,101.1 ccw(c306.3,101.1) 308.05,101.1 308.05,102.848 308.102,102.9 404.547,102.9 404.547,101.1 ; 404.495,0 404.495,1.778 cw(c406.245,1.778) 407.995,1.778 ; 404.55,101.1 ccw(c406.3,101.1) 408.05,101.1 ; 407.999,1.778 407.999,0 417.068,0 ccw(c417.044,2.256) 419.3,2.28 419.3,26.543 cw(c420.533,26.706) 420.37,27.94 421.259,27.94 ccw(c421.263,29.468) 422.79,29.464 422.79,40.513 ; 408.051,101.1 408.051,102.9 418.338,102.9 ; 421.005,41.783 cw(c421.199,40.192) 422.79,40.386 ; 421.386,41.8 396.79,41.8 396.79,52.3 418.211,52.3 ccw(c418.297,54.442) 420.44,54.356 420.44,101.092 ccw(c418.485,100.945) 418.338,102.9 ; 1316.99,1109.726 1318.895,1107.821 ; 418.338,102.9 418.338,102.9

## Other copper
Top Layer:
  region net DVDD_3.3: 300.164,55.118 300.164,50.927 293.179,50.927 292.925,51.181 292.925,55.118
  region net DVDD_3.3: 260.664,42.595 260.614,42.545 258.572,42.545 258.572,40.132 258.699,40.005 258.826,40.132 262.763,40.132 262.763,42.545 262.713,42.595
Bottom Layer:
  pour cut-out: 342.328,75.501 342.328,69.215 349.821,69.215 349.821,75.501
GND (plane layer: these items are gaps in the copper):
  lines w0.203: 393.573,27.686 393.573,96.012 178.054,96.012 177.546,95.504 177.546,7.747 179.197,6.096 416.687,6.096
VCC (plane layer: these items are gaps in the copper):
  lines w0.203: 181.356,16.002 181.356,7.747 ; 181.356,45.466 181.356,93.218 181.864,93.726 276.098,93.726 276.425,93.399 ; 266.446,74.803 266.446,84.582 ; 266.446,75.438 266.446,74.823 266.847,74.422 267.208,74.422 267.208,66.167 ; 276.298,84.655 276.298,87.43 ; 276.352,93.325 276.352,87.483 276.298,87.43 ; 295.983,57.966 345.64,57.966 356.87,46.736 356.87,38.862 ; 296.018,74.422 276.225,74.422 276.225,84.582 266.446,84.582 ; 296.091,74.349 341.557,74.349 ; 296.164,74.422 296.418,74.168 296.418,58.547 295.91,58.039 286.766,58.039 286.512,58.293 286.512,63.881 286.512,66.04 286.385,66.167 267.208,66.167 ; 341.503,80.264 341.557,80.21 341.557,74.245 ; 341.66,80.264 383.794,80.264 384.429,79.629 384.429,33.909 382.016,31.496 360.172,31.496 356.997,31.496 ; 356.997,6.604 182.499,6.604 181.356,7.747 ; 356.997,9.906 356.997,38.862 ; 356.997,10.033 356.997,6.223 356.997,4.953 413.639,4.953 ; 357.124,38.862 342.773,38.862 341.884,38.862 341.884,9.906 190.627,9.906 187.706,12.827 187.706,37.973 188.214,38.481 209.931,38.481 211.582,40.132 211.582,45.974 181.737,45.974 181.356,45.593 181.356,7.747 ; 359.791,87.63 393.446,87.63 393.446,27.94 ; 360.172,87.63 276.499,87.63 276.298,87.43 ; 266.446,84.582 259.715,84.582 259.715,78.994 260.032,78.676 260.223,78.486 263.906,78.486 264.16,78.232 264.16,74.295 264.414,74.041 265.43,73.025 265.43,68.707 264.033,67.31 259.715,67.31 258.318,65.913 258.318,45.339 258.318,43.688 259.842,43.688 264.668,43.688 264.668,65.659 265.176,66.167 267.208,66.167 ; 393.446,27.94 393.446,-0.381 393.446,27.94
  lines w0.254: 393.446,24.003 394.335,23.114 420.37,23.114 ; 393.55,41.605 393.715,41.439 396.429,41.439

## Silkscreen, mask and mechanical layers (free items; w line width, h text height)
Top Overlay:
  lines w0.254: -0.5,5 0.5,5 ; -0.5,41 0.5,41 ; -0.5,47.5 0.5,47.5 ; -0.5,51.5 0.5,51.5 ; -0.5,57.4 0.5,57.4 ; -0.5,97.9 0.5,97.9 ; -0.5,102.9 0.5,102.9 ; 0,4.5 0,5.5 ; 0,5.097 420.44,5.097 ; 0,40.5 0,41.5 ; 0,47 0,48 ; 0,51 0,52 ; 0,56.9 0,57.9 ; 0,97.4 0,98.4 ; 0,97.9 420.44,97.9 ; 0,102.4 0,103.4 ; 28.5,5 419.3,5
  text "0,102.9" at 0.5,102.9 h1
  text "0,97.9" at 0.5,97.9 h1
  text "0,57.4" at 0.5,57.4 h1
  text "0,51.5" at 0.5,51.5 h1
  text "0,47.5" at 0.5,47.5 h1
  text "0,41" at 0.5,41 h1
  text "IN48V" at 400.939,38.481 h1.52
  text "GND" at 403.098,6.731 h1.52
  text "0,5" at 0.5,5 h1

## Text inside footprints (layer, text, board x,y; h text height)
C44: Top Overlay "+" at 353.833,33.646 h0.76 r180
C46: Top Overlay "+" at 347.336,37.073 h0.76 r90
C47: Top Overlay "+" at 296.048,62.602 h0.76 r180
J3: Mechanical 1 "Alert PCB fab to slot details" at 380.462,103.092 h0.3 r270; Mechanical 1 "Assign keep-out area to slot" at 380.962,103.092 h0.3 r270; Mechanical 1 "Mech 1 - Slot cut-out" at 379.962,103.092 h0.3 r270; Mechanical 1 "Mech 2 - Clearance, move to internal plane if present" at 379.462,103.092 h0.3 r270
LED1: Mechanical 10 "2" at 342.6,47.371 h0.2 r90; Mechanical 10 "1" at 342.6,45.339 h0.2 r90
R1: Mechanical 10 "1" at 262.255,62.205 h0.64 r270; Mechanical 10 "2" at 262.255,60.731 h0.64 r270
R2: Mechanical 10 "1" at 259.715,60.604 h0.64 r90; Mechanical 10 "2" at 259.715,62.078 h0.64 r90
R3: Mechanical 10 "1" at 261.239,60.604 h0.64 r90; Mechanical 10 "2" at 261.239,62.078 h0.64 r90
R4: Mechanical 10 "1" at 254.216,50.352 h0.64 r180; Mechanical 10 "2" at 252.743,50.352 h0.64 r180
R5: Mechanical 10 "1" at 275.336,71.603 h0.64 r270; Mechanical 10 "2" at 275.336,70.129 h0.64 r270
R6: Mechanical 10 "1" at 273.52,70.418 h0.64 r180; Mechanical 10 "2" at 272.047,70.418 h0.64 r180
R7: Mechanical 10 "2" at 263.398,78.207 h0.64 r90; Mechanical 10 "1" at 263.398,76.733 h0.64 r90
R8: Mechanical 10 "1" at 268.478,78.257 h0.64 r90; Mechanical 10 "2" at 268.478,79.731 h0.64 r90
R9: Mechanical 10 "1" at 270.002,78.257 h0.64 r90; Mechanical 10 "2" at 270.002,79.731 h0.64 r90
R10: Mechanical 10 "1" at 268.249,76.327 h0.64; Mechanical 10 "2" at 269.723,76.327 h0.64
R11: Mechanical 10 "1" at 271.653,76.606 h0.64 r90; Mechanical 10 "2" at 271.653,78.08 h0.64 r90
R12: Mechanical 10 "1" at 272.276,72.222 h0.64 r90; Mechanical 10 "2" at 272.276,73.695 h0.64 r90
R20: Mechanical 10 "1" at 338.099,63.373 h0.64; Mechanical 10 "2" at 339.573,63.373 h0.64
R21: Mechanical 10 "1" at 338.099,72.136 h0.64; Mechanical 10 "2" at 339.573,72.136 h0.64
R22: Mechanical 10 "1" at 289.154,86.741 h0.64 r180; Mechanical 10 "2" at 287.68,86.741 h0.64 r180
R23: Mechanical 10 "1" at 284.378,86.233 h0.64; Mechanical 10 "2" at 285.852,86.233 h0.64
R25: Mechanical 10 "1" at 278.13,81.305 h0.64 r90; Mechanical 10 "2" at 278.13,82.779 h0.64 r90
R26: Mechanical 10 "1" at 280.236,81.407 h0.64 r90; Mechanical 10 "2" at 280.236,82.88 h0.64 r90
R28: Mechanical 10 "1" at 278.204,77.851 h0.64 r90; Mechanical 10 "2" at 278.204,79.324 h0.64 r90
R29: Mechanical 10 "1" at 280.236,77.978 h0.64 r90; Mechanical 10 "2" at 280.236,79.451 h0.64 r90
R31: Mechanical 10 "1" at 289.154,78.486 h0.64 r180; Mechanical 10 "2" at 287.68,78.486 h0.64 r180
R32: Mechanical 10 "1" at 265.557,79.908 h0.64 r270; Mechanical 10 "2" at 265.557,81.382 h0.64 r270
R33: Mechanical 10 "1" at 259.309,62.103 h0.64; Mechanical 10 "2" at 257.835,62.103 h0.64
R34: Mechanical 10 "1" at 261.239,62.078 h0.64 r90; Mechanical 10 "2" at 261.239,60.604 h0.64 r90
R35: Mechanical 10 "1" at 265.43,81.509 h0.64 r270; Mechanical 10 "2" at 265.43,80.035 h0.64 r270
R36: Mechanical 10 "1" at 252.857,35.535 h0.64 r270; Mechanical 10 "2" at 252.857,34.061 h0.64 r270
R37: Mechanical 10 "1" at 255.499,37.465 h0.64 r180; Mechanical 10 "2" at 254.025,37.465 h0.64 r180
R38: Mechanical 10 "1" at 264.287,85.877 h0.64 r90; Mechanical 10 "2" at 264.287,87.351 h0.64 r90
R39: Mechanical 10 "1" at 262.128,87.351 h0.64 r270; Mechanical 10 "2" at 262.128,85.877 h0.64 r270
R40: Mechanical 10 "1" at 253.619,30.378 h0.64 r90; Mechanical 10 "2" at 253.619,31.852 h0.64 r90
R41: Mechanical 10 "1" at 254.762,31.852 h0.64 r270; Mechanical 10 "2" at 254.762,30.378 h0.64 r270
R42: Mechanical 10 "1" at 273.177,88.417 h0.64 r90; Mechanical 10 "2" at 273.177,89.891 h0.64 r90
R43: Mechanical 10 "1" at 269.875,89.891 h0.64 r270; Mechanical 10 "2" at 269.875,88.417 h0.64 r270
R44: Mechanical 10 "1" at 255.854,82.423 h0.64; Mechanical 10 "2" at 257.327,82.423 h0.64
R45: Mechanical 10 "1" at 257.327,81.28 h0.64 r180; Mechanical 10 "2" at 255.854,81.28 h0.64 r180
R46: Mechanical 10 "1" at 272.669,93.193 h0.64 r270; Mechanical 10 "2" at 272.669,91.719 h0.64 r270
R47: Mechanical 10 "1" at 270.383,91.719 h0.64 r90; Mechanical 10 "2" at 270.383,93.193 h0.64 r90
R48: Mechanical 10 "1" at 269.215,85.852 h0.64 r180; Mechanical 10 "2" at 267.741,85.852 h0.64 r180
R49: Mechanical 10 "1" at 267.741,83.566 h0.64; Mechanical 10 "2" at 269.215,83.566 h0.64
R51: Mechanical 10 "1" at 195.732,73.787 h0.64; Mechanical 10 "2" at 197.206,73.787 h0.64
R52: Mechanical 10 "1" at 195.732,71.755 h0.64; Mechanical 10 "2" at 197.206,71.755 h0.64
R53: Mechanical 10 "1" at 195.605,69.723 h0.64; Mechanical 10 "2" at 197.079,69.723 h0.64
R54: Mechanical 10 "1" at 195.605,67.691 h0.64; Mechanical 10 "2" at 197.079,67.691 h0.64
R55: Mechanical 10 "1" at 195.605,65.786 h0.64; Mechanical 10 "2" at 197.079,65.786 h0.64
R56: Mechanical 10 "1" at 195.605,63.754 h0.64 r90; Mechanical 10 "2" at 197.079,63.754 h0.64
R57: Mechanical 10 "1" at 195.605,61.722 h0.64; Mechanical 10 "2" at 197.079,61.722 h0.64
R58: Mechanical 10 "1" at 195.605,59.69 h0.64; Mechanical 10 "2" at 197.079,59.69 h0.64
U3: Top Overlay "+" at 258.826,79.375 h0.76